# Altium PCB Temp_PowerBoard.PcbDoc (part 2 of 3)
Units mm, origin at the board's own origin, x right, y up, seen from the top; angles counter-clockwise.
Board outline 222.5 x 110 mm, 4 copper layers (Top Layer, Internal Plane 2, Internal Plane 1, Bottom Layer); 278 components, 231 nets, 981 pads, 487 vias.
Unrouted connection lines stored in the file: 81.
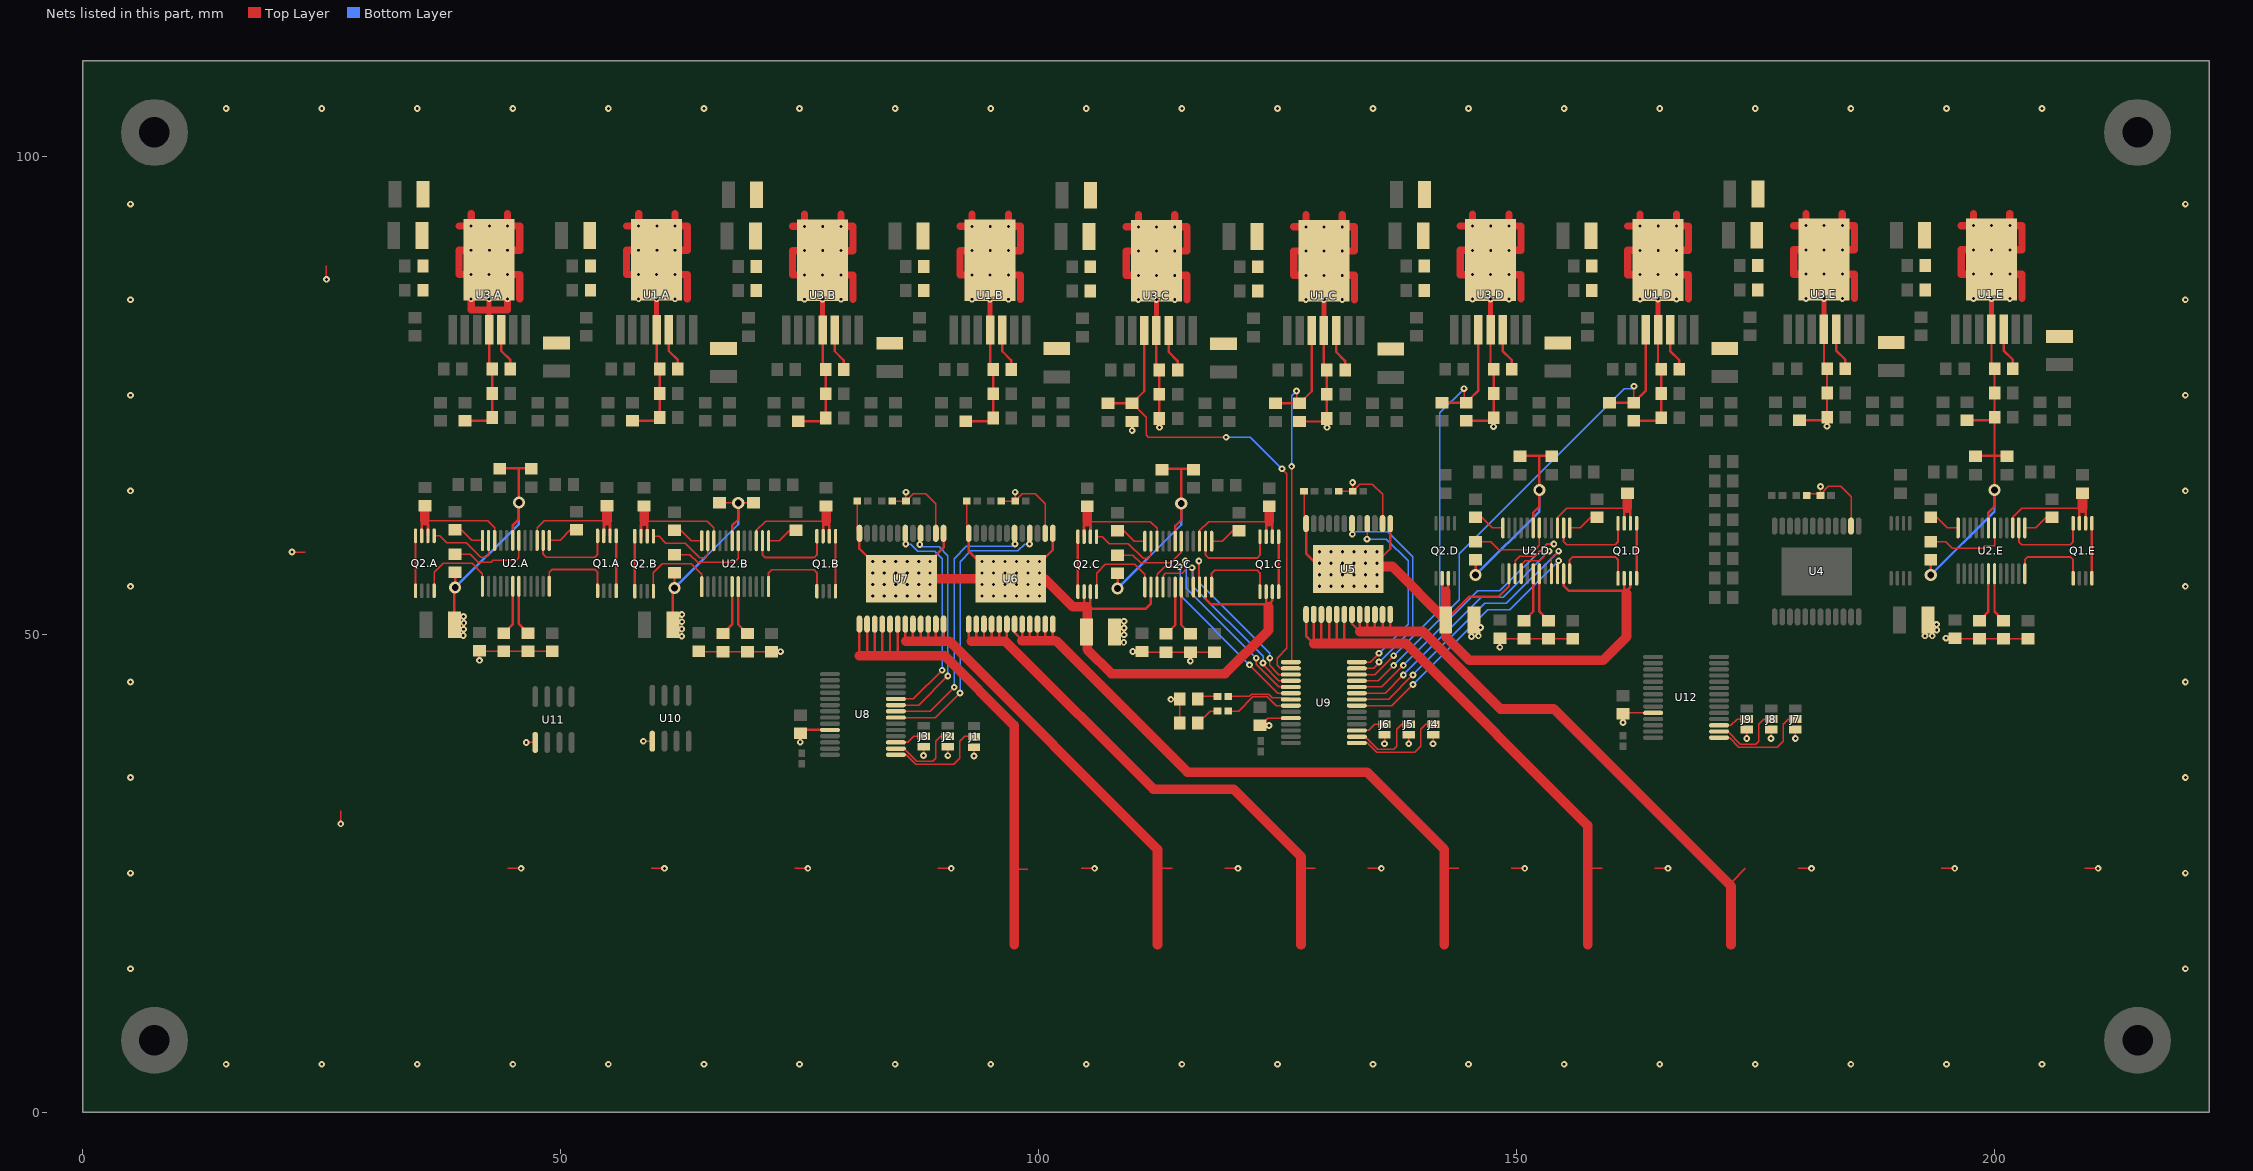
[diagram p4: the nets of this part, all layers, seen from the top]

## Via types
v1: diameter 0.7, hole 0.3, Top Layer to Bottom Layer, tented both sides, 231 vias
v2: diameter 0.7, hole 0.3, Top Layer to Bottom Layer, tented bottom, 120 vias
v3: diameter 0.66, hole 0.33, Top Layer to Bottom Layer, tented both sides, 96 vias
v4: diameter 1.27, hole 0.711, Top Layer to Bottom Layer, tented both sides, 40 vias

## Nets (pads, with @x,y where several pads share a name; then routed paths per layer and width w, separated by ;. In a path a pad name is that pad's centre, name@x,y a point inside that pad or via, vN(x,y) a via of type N, cw(c..) or ccw(c..) an arc to the next point about the centre after c; other vN are vias at no path point) (continued)
9V1: C1.C.2 Q1.C.S2 Q2.C.S1 R25.1 R26.1 U2.C.14 U2.C.23 U6.VCC U7.VCC | length 103.7
  Top Layer w0.152: R26.1@81.052,63.932 81.052,60.768 U7.VCC@81.266,60.554 ; R25.1@92.482,63.932 92.482,60.768 U6.VCC@92.696,60.554
  Top Layer w0.254: U7.VCC@81.266,60.554 81.266,58.942 84.404,55.804 U7.VCC@85.666,55.804 86.792,55.804 90.066,59.078 U7.VCC@90.066,60.554 ; U6.VCC@92.696,60.554 92.696,58.688 95.58,55.804 U6.VCC@97.096,55.804 98.476,55.804 101.496,58.824 U6.VCC@101.496,60.554 ; 104.774,53.208 Q2.C.S1@104.774,54.453 ; 105.099,52.678 111.244,52.678 111.767,53.201 U2.C.14@111.767,54.928 ; 105.424,53.208 Q2.C.S1@105.424,54.453 ; U2.C.23@117.482,54.928 117.482,53.709 118.053,53.137 123.895,53.137 ; Q1.C.S2@123.824,54.453 123.824,53.208 123.895,53.137 ; Q1.C.S2@124.474,54.453 124.474,53.542 124.069,53.137 123.895,53.137
  Top Layer w1.016: U7.VCC@86.792,55.804 U6.VCC@95.58,55.804 ; U6.VCC@98.476,55.804 100.652,55.804 103.599,52.857 105.099,52.857 105.099,52.678 105.099,48.412 107.639,45.872 119.532,45.872 124.069,50.409 124.069,52.857
  other v3: 82.666,54.004 83.866,54.004 85.066,54.004 86.266,54.004 87.466,54.004 88.666,54.004 94.096,54.004 95.296,54.004 96.496,54.004 97.696,54.004 98.896,54.004 100.096,54.004 82.666,55.204 83.866,55.204 85.066,55.204 86.266,55.204 87.466,55.204 88.666,55.204 94.096,55.204 95.296,55.204 96.496,55.204 97.696,55.204 98.896,55.204 100.096,55.204 82.666,56.404 83.866,56.404 85.066,56.404 86.266,56.404 87.466,56.404 88.666,56.404 94.096,56.404 95.296,56.404 96.496,56.404 97.696,56.404 98.896,56.404 100.096,56.404 82.666,57.604 83.866,57.604 85.066,57.604 86.266,57.604 87.466,57.604 88.666,57.604 94.096,57.604 95.296,57.604 96.496,57.604 97.696,57.604 98.896,57.604 100.096,57.604
9V1_EN1: R6.C.2 R9.C.1 U1.C.3 U9.1 | length 40.7
  Top Layer w0.152: U9.1@126.406,47.075 126.492,47.161 v1(126.492,67.564) ; v1(127,75.438) 127,74.477 R9.C.1@127.324,74.153
  Top Layer w0.254: R6.C.2@124.784,74.153 R9.C.1@127.324,74.153 128.594,75.423 U1.C.3@128.594,81.773
  Bottom Layer w0.152: v1(126.492,67.564) 126.492,74.93 v1(127,75.438)
9V1_EN2: R15.C.2 R18.C.1 U3.C.3 U9.2 | length 53
  Top Layer w0.152: R18.C.1@109.798,74.153 111.252,72.699 111.252,70.866 111.506,70.612 v1(119.634,70.612) ; v1(125.476,67.31) 125.984,66.802 125.984,48.514 124.968,47.498 124.968,46.736 125.279,46.425 U9.2@126.406,46.425
  Top Layer w0.254: R15.C.2@107.258,74.153 R18.C.1@109.798,74.153 110.116,74.47 111.068,75.423 U3.C.3@111.068,81.773
  Bottom Layer w0.152: v1(119.634,70.612) 122.174,70.612 v1(125.476,67.31)
9V1_FAULT1: U2.C.21 U9.4 | length 18.9
  Top Layer w0.152: v1(116.067,56.947) 116.212,56.803 U2.C.21@116.212,54.928 ; v1@123.495,46.787 125.158,45.125 U9.4@126.406,45.125
  Bottom Layer w0.152: v1@116.108,56.907 116.108,55.088 123.495,47.701 v1@123.495,46.787
  other v1: 123.495,46.99
9V1_FAULT2: U2.C.16 U9.5 | length 23.2
  Top Layer w0.152: U2.C.16@113.037,54.928 113.037,56.141 113.284,56.388 115.062,56.388 115.357,56.683 v1(115.357,57.658) ; v1(122.785,47.498) 122.785,46.856 125.166,44.475 U9.5@126.406,44.475
  Bottom Layer w0.152: v1(115.357,57.658) 115.458,57.557 115.458,54.825 v1(122.785,47.498)
9V1_PWRGD1: U2.C.22 U9.3 | length 19.4
  Top Layer w0.152: v1(116.778,57.658) 116.778,54.997 U2.C.22@116.847,54.928 ; v1(124.206,47.498) 124.206,46.735 125.166,45.775 U9.3@126.406,45.775
  Bottom Layer w0.152: v1(116.778,57.658) 116.778,55.434 124.206,48.006 v1(124.206,47.498)
9V1_PWRGD2: U2.C.15 U9.6 | length 23
  Top Layer w0.152: U2.C.15@112.402,54.928 112.402,56.268 113.189,57.055 v1(114.754,57.055) ; v1(122.074,46.787) 125.037,43.825 U9.6@126.406,43.825
  Bottom Layer w0.152: v1(114.754,57.055) v1@114.808,57.109 ; v1@114.808,57.15 v1@114.808,57.109 ; v1(122.074,46.787) 114.808,54.054 v1@114.808,57.109
9V1_RX1: U7.OUT1 | length 62.6
  Top Layer w0.152: 97.46,25.4 98.874,25.4
  Top Layer w0.254: 81.266,47.766 U7.OUT1@81.266,51.054 ; 82.066,47.982 U7.OUT1@82.066,51.054 ; 82.866,47.944 U7.OUT1@82.866,51.054 ; 83.666,47.906 U7.OUT1@83.666,51.054 ; 84.466,47.89 U7.OUT1@84.466,51.054 ; 85.266,47.83 U7.OUT1@85.266,51.054
  Top Layer w1.016: 81.28,47.752 90.17,47.752 97.46,40.462 97.46,25.4 97.46,17.5
9V1_RX1_EN: U7.IN1 U8.24 | length 22.2
  Top Layer w0.152: U8.24@85.076,43.229 86.917,43.229 v1(89.916,46.228)
  Bottom Layer w0.152: v1(86.106,59.436) 86.614,59.436 87.376,58.674 89.154,58.674 89.916,57.912 v1(89.916,46.228)
9V1_RX2: U7.OUT2 | length 57.2
  Top Layer w0.152: 112.46,25.662 112.622,25.5 113.974,25.5
  Top Layer w0.254: 86.066,49.316 U7.OUT2@86.066,51.054 ; 86.866,49.278 U7.OUT2@86.866,51.054 ; 87.666,49.312 U7.OUT2@87.666,51.054 ; 88.466,49.35 U7.OUT2@88.466,51.054 ; 89.266,49.388 U7.OUT2@89.266,51.054 ; 90.066,49.426 U7.OUT2@90.066,51.054
  Top Layer w1.016: 86.106,49.276 90.678,49.276 112.46,27.494 112.46,25.662 112.46,17.5
9V1_RX2_EN: U7.IN2 U8.23 | length 22.7
  Top Layer w0.152: U8.23@85.076,42.579 87.472,42.579 v1(90.519,45.625)
  Bottom Layer w0.152: v1(87.582,59.388) 87.836,59.134 89.614,59.134 90.519,58.229 v1(90.519,45.625)
9V1_TX1: U6.OUT1 | length 64.3
  Top Layer w0.152: 127.46,25.6 127.56,25.5 128.974,25.5
  Top Layer w0.254: 92.696,49.544 U6.OUT1@92.696,51.054 ; 93.496,49.506 U6.OUT1@93.496,51.054 ; 94.296,49.338 U6.OUT1@94.296,51.054 ; 95.096,49.43 U6.OUT1@95.096,51.054 ; 95.896,49.392 U6.OUT1@95.896,51.054 ; 96.696,49.452 U6.OUT1@96.696,51.054
  Top Layer w1.016: 92.964,49.276 96.52,49.276 112.014,33.782 120.396,33.782 127.46,26.718 127.46,25.6 127.46,17.5
9V1_TX1_EN: U6.IN1 U8.22 | length 27.6
  Top Layer w0.152: U8.22@85.076,41.929 88.665,41.929 v1(91.186,44.45)
  Bottom Layer w0.152: v1(91.186,44.45) 91.186,57.912 92.456,59.182 97.379,59.182 v1@97.584,59.388
  other v1: 97.536,59.436
9V1_TX2: U6.OUT2 | length 74.9
  Top Layer w0.152: 142.46,25.688 142.648,25.5 143.974,25.5
  Top Layer w0.254: U6.OUT2@97.496,51.054 97.496,50.17 98.296,49.37 U6.OUT2@98.296,51.054 ; 99.096,49.352 U6.OUT2@99.096,51.054 ; 99.896,49.39 U6.OUT2@99.896,51.054 ; 100.696,49.428 U6.OUT2@100.696,51.054 ; 101.496,49.634 U6.OUT2@101.496,51.054
  Top Layer w1.016: 98.242,49.316 101.814,49.316 115.57,35.56 134.366,35.56 142.46,27.466 142.46,25.688 142.46,17.5
9V1_TX2_EN: U6.IN2 U8.21 | length 29.6
  Top Layer w0.152: U8.21@85.076,41.279 89.22,41.279 v1(91.789,43.847)
  Bottom Layer w0.152: v1(91.789,43.847) 91.789,57.596 92.916,58.722 97.838,58.722 98.552,59.436 v1(99.06,59.436)
13V6: C1.D.2 Q1.D.S2 Q2.D.S1 R20.1 U2.D.14 U2.D.23 U5.VCC | length 82.5
  Top Layer w0.152: R20.1@127.788,64.948 127.788,61.784 U5.VCC@128.002,61.57
  Top Layer w0.254: U5.VCC@128.002,61.57 128.002,58.426 129.608,56.82 U5.VCC@132.402,56.82 134.688,56.82 134.942,57.074 136.802,58.934 U5.VCC@136.802,61.57 ; 142.237,54.605 Q2.D.S1@142.237,55.85 ; C1.D.2@142.611,51.486 145.049,53.924 148.133,53.924 149.229,55.021 U2.D.14@149.229,56.325 ; 142.887,54.605 Q2.D.S1@142.887,55.85 ; U2.D.23@154.944,56.325 154.945,55.106 155.516,54.534 161.358,54.534 ; Q1.D.S2@161.287,55.85 161.287,54.605 161.358,54.534 ; Q1.D.S2@161.937,55.85 161.937,54.939 161.532,54.534 161.358,54.534
  Top Layer w1.016: U5.VCC@134.942,57.074 137.023,57.074 C1.D.2@142.611,51.486 ; 142.611,54.485 C1.D.2@142.611,51.486 ; 161.532,54.254 161.532,49.729 159.072,47.269 145.102,47.269 142.613,49.759 142.613,51.484 C1.D.2@142.611,51.486
  other v3: 129.402,55.02 130.602,55.02 131.802,55.02 133.002,55.02 134.202,55.02 135.402,55.02 129.402,56.22 130.602,56.22 131.802,56.22 133.002,56.22 134.202,56.22 135.402,56.22 129.402,57.42 130.602,57.42 131.802,57.42 133.002,57.42 134.202,57.42 135.402,57.42 129.402,58.62 130.602,58.62 131.802,58.62 133.002,58.62 134.202,58.62 135.402,58.62
13V6_EN1: R6.D.2 R9.D.1 U1.D.3 U9.25 | length 57.2
  Top Layer w0.152: U9.25@133.306,45.125 135.549,45.125 v1(137.16,46.736) ; R9.D.1@162.284,74.231 162.306,74.253 v1(162.306,75.946)
  Top Layer w0.254: R6.D.2@159.744,74.231 R9.D.1@162.284,74.231 163.554,75.501 U1.D.3@163.554,81.851
  Bottom Layer w0.152: v1(137.16,46.736) 144.018,53.594 144.018,58.42 161.29,75.692 162.306,75.692 v1(162.306,75.946)
13V6_EN2: R15.D.2 R18.D.1 U3.D.3 U9.26 | length 47.9
  Top Layer w0.152: U9.26@133.306,45.775 135.183,45.775 v1(137.16,47.752) ; v1(144.526,75.692) 144.526,74.463 R18.D.1@144.758,74.231
  Top Layer w0.254: R15.D.2@142.218,74.231 R18.D.1@144.758,74.231 145.075,74.548 146.028,75.501 U3.D.3@146.028,81.851
  Bottom Layer w0.152: v1(137.16,47.752) 141.986,52.578 141.986,73.152 v1(144.526,75.692)
13V6_FAULT1: U2.D.21 U9.22 | length 30.2
  Top Layer w0.152: U9.22@133.306,43.175 136.625,43.175 v1(139.181,45.731) ; U2.D.21@153.674,56.325 153.674,57.939 v1(154.421,58.685)
  Bottom Layer w0.152: v1(139.181,45.731) 146.678,53.228 148.964,53.228 v1(154.421,58.685)
13V6_FAULT2: U2.D.16 U9.23 | length 30.7
  Top Layer w0.152: U9.23@133.306,43.825 136.27,43.825 v1(138.176,45.731) ; U2.D.16@150.499,56.325 150.499,57.281 150.916,57.698 152.429,57.698 v1(153.416,58.685)
  Bottom Layer w0.152: v1(138.176,45.731) 146.323,53.878 148.609,53.878 v1(153.416,58.685)
13V6_PWRGD1: U2.D.22 U9.21 | length 28.9
  Top Layer w0.152: U9.21@133.306,42.525 136.979,42.525 v1(139.181,44.726) ; U2.D.22@154.309,56.325 154.309,57.698 154.403,57.698 v1(154.421,57.68)
  Bottom Layer w0.152: v1(139.181,44.726) 147.032,52.578 149.318,52.578 v1(154.421,57.68)
13V6_PWRGD2: U2.D.15 U9.24 | length 32.9
  Top Layer w0.152: U9.24@133.306,44.475 135.915,44.475 v1(138.176,46.736) ; U2.D.15@149.864,56.325 149.864,57.662 150.368,58.166 151.892,58.166 153.162,59.436 v1(153.924,59.436)
  Bottom Layer w0.152: v1(138.176,46.736) 145.968,54.528 148.254,54.528 153.162,59.436 v1(153.924,59.436)
13V6_TX1: U5.OUT1 | length 69.1
  Top Layer w0.152: 157.56,25.5 158.974,25.5
  Top Layer w0.254: U5.OUT1@128.002,52.07 128.002,49.822 128.802,49.022 U5.OUT1@128.802,52.07 ; 129.602,49.022 U5.OUT1@129.602,52.07 ; 130.402,49.022 U5.OUT1@130.402,52.07 ; 131.202,49.022 U5.OUT1@131.202,52.07 ; 132.002,49.022 U5.OUT1@132.002,52.07
  Top Layer w1.016: 128.802,49.022 129.602,49.022 130.402,49.022 131.202,49.022 132.002,49.022 138.43,49.022 157.46,29.992 157.46,17.5
13V6_TX1_EN: U5.IN1 U9.27 | length 22.7
  Top Layer w0.152: U9.27@133.306,46.425 135.06,46.425 v1@135.636,47.001
  Bottom Layer w0.152: v1(132.842,60.452) 132.842,60.695 136.566,60.695 139.144,58.118 139.144,50.594 v1(135.636,47.087) v1@135.636,47.001
13V6_TX2: U5.OUT2 | length 69.5
  Top Layer w0.152: 172.46,23.628 172.46,23.986 173.974,25.5
  Top Layer w0.254: U5.OUT2@132.802,52.07 132.802,51.092 133.602,50.292 U5.OUT2@133.602,52.07 ; 134.402,50.292 U5.OUT2@134.402,52.07 ; 135.202,50.292 U5.OUT2@135.202,52.07 ; 136.002,50.292 U5.OUT2@136.002,52.07 ; 136.802,50.292 U5.OUT2@136.802,52.07
  Top Layer w1.016: 133.602,50.292 134.402,50.292 135.202,50.292 136.002,50.292 136.802,50.292 140.208,50.292 148.336,42.164 153.924,42.164 172.46,23.628 172.46,17.5
13V6_TX2_EN: U5.IN2 U9.28 | length 20.5
  Top Layer w0.152: U9.28@133.306,47.075 134.705,47.075 v1(135.636,48.006) ; v1@134.402,59.98 U5.IN2@134.402,61.57
  Bottom Layer w0.152: v1(134.366,59.944) 136.398,59.944 138.684,57.658 138.684,51.054 v1(135.636,48.006)
DEBUG1: R33.1 U9.8 | length 7.6
  Top Layer w0.152: R33.1@119.838,41.962 120.956,41.962 122.428,43.434 123.952,43.434 124.861,42.525 U9.8@126.406,42.525
DEBUG2: R34.1 U9.7 | length 6.9
  Top Layer w0.152: R34.1@119.838,43.486 122.049,43.486 122.302,43.739 124.078,43.739 124.446,43.371 126.21,43.371 U9.7@126.406,43.175
GND: C1.A.1 C1.B.1 C1.C.1 C1.D.1 C1.E.1 C3.A.2 C3.B.2 C3.C.2 C3.D.2 C3.E.2 C4.A.1 C4.B.1 C4.C.1 C4.D.1 C4.E.1 C6.A.1 C6.B.1 C6.C.1 C6.D.1 C6.E.1 C7.A.1 C7.B.1 C7.C.1 C7.D.1 C7.E.1 C8.A.1 C8.B.1 C8.C.1 C8.D.1 C8.E.1 C9.A.2 C9.B.2 C9.C.2 C9.D.2 C9.E.2 C10.A.2 C10.B.2 C10.C.2 C10.D.2 C10.E.2 C11.A.1 C11.B.1 C11.C.1 C11.D.1 C11.E.1 C13.A.2 C13.B.2 C13.C.2 C13.D.2 C13.E.2 C15.A.1 C15.B.1 C15.C.1 C15.D.1 C15.E.1 C16.A.1 C16.B.1 C16.C.1 C16.D.1 C16.E.1 C17.A.2 C17.B.2 C17.C.2 C17.D.2 C17.E.2 C18.A.2 C18.B.2 C18.C.2 C18.D.2 C18.E.2 C19.A.1 C19.B.1 C19.C.1 C19.D.1 C19.E.1 C20.2 C21.2 C22.2 D1.2 D2.2 J1.3 J2.3 J3.3 J4.3 J5.3 J6.3 J7.3 J8.3 J9.3 R3.A.1 R3.B.1 R3.C.1 R3.D.1 R3.E.1 R7.A.1 R7.B.1 R7.C.1 R7.D.1 R7.E.1 R8.A.1 R8.B.1 R8.C.1 R8.D.1 R8.E.1 R9.A.2 R9.B.2 R9.C.2 R9.D.2 R9.E.2 R10.A.1 R10.B.1 R10.C.1 R10.D.1 R10.E.1 R16.A.1 R16.B.1 R16.C.1 R16.D.1 R16.E.1 R17.A.1 R17.B.1 R17.C.1 R17.D.1 R17.E.1 R18.A.2 R18.B.2 R18.C.2 R18.D.2 R18.E.2 R21.2 R22.2 R23.2 R24.2 R27.2 R28.2 R29.2 R30.2 R44.A.2 R44.B.2 R44.C.2 R44.D.2 R44.E.2 R45.A.2 R45.B.2 R45.C.2 R45.D.2 R45.E.2 U1.A.4 U1.B.4 U1.C.4 U1.D.4 U1.E.4 U2.A.7 U2.B.7 U2.C.7 U2.D.7 U2.E.7 U3.A.4 U3.B.4 U3.C.4 U3.D.4 U3.E.4 U4.GND U5.GND U6.GND U7.GND U8.10 U9.10 U10.5 U11.5 U12.10 | length 891.1
  Top Layer w0.152: v1(21.9,58.59) 23.3,58.59 ; v1(25.5,87.126) 25.5,88.526 ; v1(27,30.15) 27,31.55 ; C1.A.1@38.862,49.86 v1(39.812,49.86) ; C1.A.1@38.887,50.521 v1(39.837,50.521) ; C1.A.1@38.887,51.841 v1(39.837,51.841) ; C1.A.1@38.913,51.181 v1(39.862,51.181) ; v1(41.508,47.26) 41.508,48.21 R44.A.2@49.128,48.21 ; 44.474,25.5 v1(45.874,25.5) ; v1(46.407,38.672) U11.5@47.338,38.672 ; v1(58.662,38.803) U10.5@59.593,38.803 ; 59.474,25.5 v1(60.874,25.5) ; C1.B.1@61.722,49.784 v1(62.672,49.784) ; C1.B.1@61.722,50.546 v1(62.672,50.546) ; C1.B.1@61.741,51.308 v1(62.691,51.308) ; C1.B.1@61.741,52.07 v1(62.691,52.07) ; R45.B.2@64.453,48.172 R44.B.2@72.073,48.172 v1(73.004,48.172) ; R10.B.1@66.612,63.744 R3.B.1@70.172,63.744 ; 74.474,25.5 v1(75.874,25.5) ; v1(75.08,38.707) C20.2@75.08,39.638 ; R29.2@84.692,63.932 R30.2@86.132,63.932 ; v1(86.132,64.863) R30.2@86.132,63.932 ; v1@87.976,37.092 J3.3@87.976,38.236 ; U7.GND@89.266,60.554 89.266,63.634 88.206,64.694 86.894,64.694 R30.2@86.132,63.932 ; 89.474,25.5 v1(90.874,25.5) ; v1@90.516,37.083 J2.3@90.516,38.227 ; v1@93.256,37.043 J1.3@93.256,38.187 ; R27.2@96.122,63.932 R28.2@97.562,63.932 ; v1(97.562,64.863) R28.2@97.562,63.932 ; U6.GND@100.696,60.554 100.696,63.634 99.636,64.694 98.324,64.694 R28.2@97.562,63.932 ; 104.474,25.5 v1(105.874,25.5) ; C1.C.1@107.975,49.149 v1(108.925,49.149) ; C1.C.1@108.001,49.936 v1(108.95,49.936) ; C1.C.1@108.001,50.648 v1(108.95,50.648) ; C1.C.1@108.001,51.359 v1(108.95,51.359) ; v1(109.798,71.322) R18.C.2@109.798,72.253 ; v1(109.864,48.189) R45.C.2@110.814,48.189 ; R45.C.2@110.814,48.123 R44.C.2@118.434,48.123 ; v1(112.658,71.637) R16.C.1@112.658,72.568 ; v1(113.851,43.18) D2.2@114.782,43.18 ; D1.2@114.782,40.692 D2.2@114.782,43.232 ; v1(115.894,47.192) C4.C.1@115.894,48.123 ; 119.474,25.5 v1(120.874,25.5) ; v1(124.121,40.452) C21.2@123.19,40.452 123.963,41.225 U9.10@126.406,41.225 ; v1(130.184,71.637) R8.C.1@130.184,72.568 ; R23.2@131.428,64.948 R24.2@132.868,64.948 ; v1(132.868,65.879) R24.2@132.868,64.948 ; 134.474,25.5 v1(135.874,25.5) ; U5.GND@136.002,61.57 136.002,64.65 134.942,65.71 133.63,65.71 R24.2@132.868,64.948 ; v1@136.206,38.329 v1(136.206,38.532) J6.3@136.206,39.473 ; v1@138.746,38.329 v1(138.746,38.532) J5.3@138.746,39.473 ; v1@141.286,38.329 v1(141.286,38.532) J4.3@141.286,39.473 ; v1(145.313,49.749) 145.313,50.698 v1(146.263,50.698) ; v1(146.025,49.825) C1.D.1@146.025,50.775 ; v1(147.618,71.715) R16.D.1@147.618,72.646 ; v1(148.277,48.636) R45.D.2@148.277,49.586 ; R45.D.2@148.277,49.52 R44.D.2@155.897,49.52 ; 149.474,25.5 v1(150.874,25.5) ; v1(161.158,40.751) C22.2@161.158,41.682 161.245,41.769 U12.10@164.312,41.769 ; 164.474,25.5 v1(165.874,25.5) ; v1(174.112,39.076) J9.3@174.112,40.026 ; v1(176.652,39.076) J8.3@176.652,40.026 ; v1(179.192,39.076) J7.3@179.192,40.026 ; 179.474,25.5 v1(180.874,25.5) ; R21.2@180.45,64.694 181.89,64.694 182.652,65.456 183.964,65.456 185.024,64.396 U4.GND@185.024,61.316 ; R22.2@181.822,64.516 v1(181.822,65.447) ; v1(182.508,71.764) R16.E.1@182.508,72.695 ; v1(192.761,49.825) C1.E.1@192.761,50.775 ; C1.E.1@193.015,51.029 v1(193.964,51.029) ; C1.E.1@193.04,50.444 v1(193.99,50.444) ; v1(193.523,49.825) C1.E.1@193.523,50.775 ; 194.474,25.5 v1(195.874,25.5) ; v1(194.954,49.586) R45.E.2@195.904,49.586 ; R45.E.2@195.904,49.52 R44.E.2@203.524,49.52 ; 209.474,25.5 v1(210.874,25.5)
  Top Layer w0.254: C1.A.1@38.881,50.978 38.881,54.788 v4(38.968,54.875) C3.A.2@38.968,56.465 ; R18.A.2@39.984,72.34 R16.A.1@42.529,72.34 ; U3.A.4@42.524,81.86 42.524,78.055 C18.A.2@42.844,77.735 R17.A.1@42.844,75.195 R16.A.1@42.844,72.655 ; R10.A.1@43.667,67.382 45.638,67.382 ; U2.A.7@45.003,59.817 U2.A.7@45.001,59.815 45.001,61.415 45.638,62.053 v4(45.638,63.765) 45.638,67.382 ; R3.A.1@46.969,67.382 45.638,67.382 ; R9.A.2@57.51,72.34 R8.A.1@60.055,72.34 ; U1.A.4@60.05,81.86 60.05,78.055 C10.A.2@60.37,77.735 R8.A.1@60.37,72.655 ; C1.B.1@61.741,50.978 61.741,54.665 v4(61.913,54.837) C3.B.2@61.913,56.427 ; U2.B.7@67.948,59.779 U2.B.7@67.946,59.777 67.946,61.378 68.583,62.015 v4(68.583,63.727) ; R18.B.2@74.867,72.302 R16.B.1@77.412,72.302 ; C20.2@75.08,39.638 75.421,39.979 U8.10@78.176,39.979 ; U3.B.4@77.407,81.822 77.407,78.017 C18.B.2@77.727,77.697 R16.B.1@77.727,72.617 ; R9.B.2@92.393,72.302 R8.B.1@94.938,72.302 ; U1.B.4@94.933,81.822 94.933,78.017 C10.B.2@95.253,77.697 R8.B.1@95.253,72.617 ; v4(108.274,54.788) C3.C.2@108.274,56.378 ; U3.C.4@112.338,81.773 112.338,77.968 C18.C.2@112.658,77.648 R16.C.1@112.658,72.568 ; R10.C.1@112.973,67.295 114.944,67.295 ; U2.C.7@114.309,59.731 U2.C.7@114.307,59.728 114.307,61.329 114.944,61.966 v4(114.944,63.678) 114.944,67.295 ; R3.C.1@116.275,67.295 114.944,67.295 ; R9.C.2@127.324,72.253 R8.C.1@129.869,72.253 ; U1.C.4@129.864,81.773 129.864,77.968 C10.C.2@130.184,77.648 R8.C.1@130.184,72.568 ; R18.D.2@144.758,72.331 R16.D.1@147.303,72.331 ; v4(145.737,56.185) C3.D.2@145.737,57.775 ; U3.D.4@147.298,81.851 147.298,78.046 C18.D.2@147.618,77.726 R16.D.1@147.618,72.646 ; R10.D.1@150.436,68.692 152.407,68.692 ; U2.D.7@151.772,61.127 U2.D.7@151.769,61.125 151.769,62.725 152.407,63.363 v4(152.407,65.075) 152.407,68.692 ; R3.D.1@153.738,68.692 152.407,68.692 ; R9.D.2@162.284,72.331 R8.D.1@164.829,72.331 ; U1.D.4@164.824,81.851 164.824,78.046 C10.D.2@165.144,77.726 R8.D.1@165.144,72.646 ; R18.E.2@179.648,72.38 R16.E.1@182.193,72.38 ; U3.E.4@182.188,81.9 182.188,78.095 C18.E.2@182.508,77.775 R16.E.1@182.508,72.695 ; v4(193.364,56.185) C3.E.2@193.364,57.775 ; R9.E.2@197.174,72.38 R8.E.1@199.719,72.38 ; R10.E.1@198.063,68.692 200.034,68.692 ; U2.E.7@199.399,61.128 U2.E.7@199.397,61.125 199.397,62.726 200.034,63.363 v4(200.034,65.075) 200.034,68.692 ; U1.E.4@199.714,81.9 199.714,78.095 C10.E.2@200.034,77.775 R8.E.1@200.034,72.695 200.034,68.692 ; R3.E.1@201.365,68.692 200.034,68.692
  Top Layer w0.508: U3.A.4@42.524,81.86 42.524,83.923 v2(42.524,87.63) U3.A.4@42.524,89.165 ; U1.A.4@60.05,81.86 U1.A.4@60.05,89.165 v2(60.05,87.63) ; U3.B.4@77.407,81.822 U3.B.4@77.407,89.127 v2(77.407,87.592) ; U1.B.4@94.933,81.822 U1.B.4@94.933,89.127 v2(94.933,87.592) ; U3.C.4@112.338,81.773 U3.C.4@112.338,89.078 v2(112.338,87.543) ; U1.C.4@129.864,81.773 U1.C.4@129.864,89.078 v2(129.864,87.543) ; U3.D.4@147.298,81.851 U3.D.4@147.298,89.156 v2(147.298,87.621) ; U1.D.4@164.824,81.851 U1.D.4@164.824,89.156 v2(164.824,87.621) ; U3.E.4@182.188,81.9 U3.E.4@182.188,89.205 v2(182.188,87.67) ; U1.E.4@199.714,81.9 U1.E.4@199.714,89.205 v2(199.714,87.67)
  Top Layer w0.762: 39.37,92.71 v2(40.64,92.71) ; 40.64,93.98 v2(40.64,92.71) ; 44.45,93.98 v2(44.45,92.71) ; 45.72,85.09 45.72,87.63 v2(44.45,87.63) ; 56.896,92.71 v2(58.166,92.71) ; 58.166,93.98 v2(58.166,92.71) ; 61.976,93.98 v2(61.976,92.71) ; 63.246,85.09 63.246,87.63 v2(61.976,87.63) ; 74.253,92.672 v2(75.523,92.672) ; 75.523,93.942 v2(75.523,92.672) ; 79.333,93.942 v2(79.333,92.672) ; 80.603,85.052 80.603,87.592 v2(79.333,87.592) ; 91.779,92.672 v2(93.049,92.672) ; 93.049,93.942 v2(93.049,92.672) ; 96.859,93.942 v2(96.859,92.672) ; 98.129,85.052 98.129,87.592 v2(96.859,87.592) ; 109.184,92.623 v2(110.454,92.623) ; 110.454,93.893 v2(110.454,92.623) ; 114.264,93.893 v2(114.264,92.623) ; 115.534,85.003 115.534,87.543 v2(114.264,87.543) ; 126.71,92.623 v2(127.98,92.623) ; 127.98,93.893 v2(127.98,92.623) ; 131.79,93.893 v2(131.79,92.623) ; 133.06,85.003 133.06,87.543 v2(131.79,87.543) ; 144.144,92.701 v2(145.414,92.701) ; 145.414,93.971 v2(145.414,92.701) ; 149.224,93.971 v2(149.224,92.701) ; 150.494,85.081 150.494,87.621 v2(149.224,87.621) ; 161.67,92.701 v2(162.94,92.701) ; 162.94,93.971 v2(162.94,92.701) ; 166.75,93.971 v2(166.75,92.701) ; 168.02,85.081 168.02,87.621 v2(166.75,87.621) ; 179.034,92.75 v2(180.304,92.75) ; 180.304,94.02 v2(180.304,92.75) ; 184.114,94.02 v2(184.114,92.75) ; 185.384,85.13 185.384,87.67 v2(184.114,87.67) ; 196.56,92.75 v2(197.83,92.75) ; 197.83,94.02 v2(197.83,92.75) ; 201.64,94.02 v2(201.64,92.75) ; 202.91,85.13 202.91,87.67 v2(201.64,87.67) ; v2(40.64,87.63) v2(42.524,87.63) v2(44.45,87.63) ; v2(40.64,87.63) 39.37,87.63 39.37,90.17 v2(40.64,90.17) ; v2(40.64,87.63) v2(40.64,90.17) ; v2(40.64,87.63) 40.64,83.923 42.524,83.923 44.45,83.923 v2(44.45,87.63) ; v2(40.64,90.17) v2(44.45,90.17) ; v2(40.64,90.17) v2(40.64,92.71) ; v2(40.64,92.71) v2(44.45,92.71) ; v2(44.45,87.63) v2(44.45,90.17) ; v2(44.45,90.17) 45.72,90.17 45.72,92.71 v2(44.45,92.71) ; v2(44.45,90.17) v2(44.45,92.71) ; v2(58.166,87.63) v2(58.166,90.17) ; v2(58.166,87.63) 56.896,87.63 56.896,90.17 v2(58.166,90.17) ; v2(58.166,87.63) v2(60.05,87.63) v2(61.976,87.63) ; v2(58.166,90.17) v2(58.166,92.71) ; v2(58.166,90.17) v2(61.976,90.17) ; v2(58.166,92.71) v2(61.976,92.71) ; v2(61.976,87.63) v2(61.976,90.17) ; v2(61.976,90.17) v2(61.976,92.71) ; v2(61.976,90.17) 63.246,90.17 63.246,92.71 v2(61.976,92.71) ; v2(75.523,87.592) v2(75.523,90.132) ; v2(75.523,87.592) 74.253,87.592 74.253,90.132 v2(75.523,90.132) ; v2(75.523,87.592) v2(77.407,87.592) v2(79.333,87.592) ; v2(75.523,90.132) v2(75.523,92.672) ; v2(75.523,90.132) v2(79.333,90.132) ; v2(75.523,92.672) v2(79.333,92.672) ; v2(79.333,87.592) v2(79.333,90.132) ; v2(79.333,90.132) v2(79.333,92.672) ; v2(79.333,90.132) 80.603,90.132 80.603,92.672 v2(79.333,92.672) ; v2(93.049,87.592) v2(93.049,90.132) ; v2(93.049,87.592) 91.779,87.592 91.779,90.132 v2(93.049,90.132) ; v2(93.049,87.592) v2(94.933,87.592) v2(96.859,87.592) ; v2(93.049,90.132) v2(93.049,92.672) ; v2(93.049,90.132) v2(96.859,90.132) ; v2(93.049,92.672) v2(96.859,92.672) ; v2(96.859,87.592) v2(96.859,90.132) ; v2(96.859,90.132) v2(96.859,92.672) ; v2(96.859,90.132) 98.129,90.132 98.129,92.672 v2(96.859,92.672) ; v2(110.454,87.543) v2(110.454,90.083) ; v2(110.454,87.543) 109.184,87.543 109.184,90.083 v2(110.454,90.083) ; v2(110.454,87.543) v2(112.338,87.543) v2(114.264,87.543) ; v2(110.454,90.083) v2(110.454,92.623) ; v2(110.454,90.083) v2(114.264,90.083) ; v2(110.454,92.623) v2(114.264,92.623) ; v2(114.264,87.543) v2(114.264,90.083) ; v2(114.264,90.083) v2(114.264,92.623) ; v2(114.264,90.083) 115.534,90.083 115.534,92.623 v2(114.264,92.623) ; v2(127.98,87.543) v2(127.98,90.083) ; v2(127.98,87.543) 126.71,87.543 126.71,90.083 v2(127.98,90.083) ; v2(127.98,87.543) v2(129.864,87.543) v2(131.79,87.543) ; v2(127.98,90.083) v2(127.98,92.623) ; v2(127.98,90.083) v2(131.79,90.083) ; v2(127.98,92.623) v2(131.79,92.623) ; v2(131.79,87.543) v2(131.79,90.083) ; v2(131.79,90.083) v2(131.79,92.623) ; v2(131.79,90.083) 133.06,90.083 133.06,92.623 v2(131.79,92.623) ; v2(145.414,87.621) v2(145.414,90.161) ; v2(145.414,87.621) 144.144,87.621 144.144,90.161 v2(145.414,90.161) ; v2(145.414,87.621) v2(147.298,87.621) v2(149.224,87.621) ; v2(145.414,90.161) v2(145.414,92.701) ; v2(145.414,90.161) v2(149.224,90.161) ; v2(145.414,92.701) v2(149.224,92.701) ; v2(149.224,87.621) v2(149.224,90.161) ; v2(149.224,90.161) v2(149.224,92.701) ; v2(149.224,90.161) 150.494,90.161 150.494,92.701 v2(149.224,92.701) ; v2(162.94,87.621) v2(162.94,90.161) ; v2(162.94,87.621) 161.67,87.621 161.67,90.161 v2(162.94,90.161) ; v2(162.94,87.621) v2(164.824,87.621) v2(166.75,87.621) ; v2(162.94,90.161) v2(162.94,92.701) ; v2(162.94,90.161) v2(166.75,90.161) ; v2(162.94,92.701) v2(166.75,92.701) ; v2(166.75,87.621) v2(166.75,90.161) ; v2(166.75,90.161) v2(166.75,92.701) ; v2(166.75,90.161) 168.02,90.161 168.02,92.701 v2(166.75,92.701) ; v2(180.304,87.67) v2(180.304,90.21) ; v2(180.304,87.67) 179.034,87.67 179.034,90.21 v2(180.304,90.21) ; v2(180.304,87.67) v2(182.188,87.67) v2(184.114,87.67) ; v2(180.304,90.21) v2(180.304,92.75) ; v2(180.304,90.21) v2(184.114,90.21) ; v2(180.304,92.75) v2(184.114,92.75) ; v2(184.114,87.67) v2(184.114,90.21) ; v2(184.114,90.21) v2(184.114,92.75) ; v2(184.114,90.21) 185.384,90.21 185.384,92.75 v2(184.114,92.75) ; v2(197.83,87.67) v2(197.83,90.21) ; v2(197.83,87.67) 196.56,87.67 196.56,90.21 v2(197.83,90.21) ; v2(197.83,87.67) v2(199.714,87.67) v2(201.64,87.67) ; v2(197.83,90.21) v2(197.83,92.75) ; v2(197.83,90.21) v2(201.64,90.21) ; v2(197.83,92.75) v2(201.64,92.75) ; v2(201.64,87.67) v2(201.64,90.21) ; v2(201.64,90.21) v2(201.64,92.75) ; v2(201.64,90.21) 202.91,90.21 202.91,92.75 v2(201.64,92.75)
  Bottom Layer w0.254: v4(38.968,54.875) 45.638,61.545 v4(45.638,63.765) ; v4(61.913,54.837) 68.583,61.507 v4(68.583,63.727) ; v4(108.274,54.788) 114.944,61.458 v4(114.944,63.678) ; v4(145.737,56.185) 152.407,62.855 v4(152.407,65.075) ; v4(193.364,56.185) 200.034,62.855 v4(200.034,65.075)
  other v1: 15,5 25,5 35,5 45,5 55,5 65,5 75,5 85,5 95,5 105,5 115,5 125,5 135,5 145,5 155,5 165,5 175,5 185,5 195,5 205,5 5,15 220,15 5,25 220,25 5,35 220,35 93.256,37.255 87.976,37.304 90.516,37.295 5,45 220,45 5,55 220,55 5,65 220,65 5,75 220,75 5,85 220,85 5,95 220,95 15,105 25,105 35,105 45,105 55,105 65,105 75,105 85,105 95,105 105,105 115,105 125,105 135,105 145,105 155,105 165,105 175,105 185,105 195,105 205,105
  other v2: 110.454,85.003 112.338,85.003 114.264,85.003 127.98,85.003 129.864,85.003 131.79,85.003 75.523,85.052 77.407,85.052 79.333,85.052 93.049,85.052 94.933,85.052 96.859,85.052 40.64,85.09 42.524,85.09 44.45,85.09 58.166,85.09 60.05,85.09 61.976,85.09 145.414,85.081 147.298,85.081 149.224,85.081 162.94,85.081 164.824,85.081 166.75,85.081 180.304,85.13 182.188,85.13 184.114,85.13 197.83,85.13 199.714,85.13 201.64,85.13 112.359,90.083 129.885,90.083 77.428,90.132 94.954,90.132 42.545,90.17 60.071,90.17 147.319,90.161 164.845,90.161 182.209,90.21 199.735,90.21 112.359,92.623 129.885,92.623 77.428,92.672 94.954,92.672 42.545,92.71 60.071,92.71 147.319,92.701 164.845,92.701 182.209,92.75 199.735,92.75
NetC2.A_2: C2.A.2 U2.A.1 | length 2.7
  Top Layer w0.152: U2.A.1@48.811,59.815 49.938,59.815 C2.A.2@51.033,60.91
NetC2.B_2: C2.B.2 U2.B.1 | length 2.7
  Top Layer w0.152: U2.B.1@71.756,59.777 72.883,59.777 C2.B.2@73.978,60.872
NetC2.C_2: C2.C.2 U2.C.1 | length 2.7
  Top Layer w0.152: U2.C.1@118.117,59.728 119.244,59.728 C2.C.2@120.339,60.823
NetC2.D_2: C2.D.2 U2.D.1 | length 2.7
  Top Layer w0.152: U2.D.1@155.579,61.125 156.707,61.125 C2.D.2@157.802,62.22
NetC2.E_2: C2.E.2 U2.E.1 | length 2.7
  Top Layer w0.152: U2.E.1@203.207,61.125 204.334,61.125 C2.E.2@205.429,62.22
NetC3.A_1: C3.A.1 U2.A.6 | length 9
  Top Layer w0.152: C3.A.1@38.968,58.365 40.558,58.365 41.381,57.542 42.737,57.542 42.923,57.729 45.378,57.729 45.636,57.986 U2.A.6@45.636,59.815
NetC3.B_1: C3.B.1 U2.B.6 | length 9
  Top Layer w0.152: C3.B.1@61.913,58.327 63.503,58.327 64.326,57.504 68.136,57.504 68.581,57.949 U2.B.6@68.581,59.777
NetC3.C_1: C3.C.1 U2.C.6 | length 8.6
  Top Layer w0.152: C3.C.1@108.274,58.278 109.864,58.278 110.687,57.455 113.843,57.455 114.942,58.554 U2.C.6@114.942,59.728
NetC3.D_1: C3.D.1 U2.D.6 | length 9
  Top Layer w0.152: C3.D.1@145.737,59.675 147.327,59.675 148.15,58.852 151.96,58.852 152.405,59.297 U2.D.6@152.404,61.125
NetC3.E_1: C3.E.1 U2.E.6 | length 8.9
  Top Layer w0.152: C3.E.1@193.364,59.675 194.954,59.675 195.63,58.999 198.794,58.999 199.048,59.253 199.988,59.253 200.032,59.297 U2.E.6@200.032,61.125
NetC4.A_2: C4.A.2 U2.A.19 | length 5.3
  Top Layer w0.254: U2.A.19@45.636,55.015 45.636,51.062 C4.A.2@46.588,50.11
NetC4.B_2: C4.B.2 U2.B.19 | length 5.3
  Top Layer w0.254: U2.B.19@68.581,54.977 68.581,51.024 C4.B.2@69.533,50.072
NetC4.C_2: C4.C.2 U2.C.19 | length 5.3
  Top Layer w0.254: U2.C.19@114.942,54.928 114.942,50.976 C4.C.2@115.894,50.023
NetC4.D_2: C4.D.2 U2.D.19 | length 5.3
  Top Layer w0.254: U2.D.19@152.404,56.325 152.405,52.372 C4.D.2@153.357,51.42
NetC4.E_2: C4.E.2 U2.E.19 | length 5.3
  Top Layer w0.254: U2.E.19@200.032,56.325 200.032,52.373 C4.E.2@200.984,51.42
NetC6.A_2: C6.A.2 U2.A.18 | length 5.3
  Top Layer w0.254: C6.A.2@44.048,50.11 45.001,51.063 U2.A.18@45.001,55.015
NetC6.B_2: C6.B.2 U2.B.18 | length 5.3
  Top Layer w0.254: C6.B.2@66.993,50.072 67.946,51.024 U2.B.18@67.946,54.977
NetC6.C_2: C6.C.2 U2.C.18 | length 5.3
  Top Layer w0.254: C6.C.2@113.354,50.023 114.307,50.975 U2.C.18@114.307,54.928
NetC6.D_2: C6.D.2 U2.D.18 | length 5.3
  Top Layer w0.254: C6.D.2@150.817,51.42 151.769,52.372 U2.D.18@151.769,56.325
NetC6.E_2: C6.E.2 U2.E.18 | length 5.3
  Top Layer w0.254: C6.E.2@198.444,51.42 199.397,52.372 U2.E.18@199.397,56.325
NetC10.A_1: C10.A.1 U1.A.5 | length 4.5
  Top Layer w0.254: U1.A.5@61.32,81.86 61.32,79.64 62.27,78.69 C10.A.1@62.27,77.735
NetC10.B_1: C10.B.1 U1.B.5 | length 4.5
  Top Layer w0.254: U1.B.5@96.203,81.822 96.203,79.602 97.153,78.652 C10.B.1@97.153,77.697
NetC10.C_1: C10.C.1 U1.C.5 | length 4.5
  Top Layer w0.254: U1.C.5@131.134,81.773 131.134,79.553 132.084,78.603 C10.C.1@132.084,77.648
NetC10.D_1: C10.D.1 U1.D.5 | length 4.5
  Top Layer w0.254: U1.D.5@166.094,81.851 166.094,79.631 167.044,78.681 C10.D.1@167.044,77.726
NetC10.E_1: C10.E.1 U1.E.5 | length 4.5
  Top Layer w0.254: U1.E.5@200.984,81.9 200.984,79.68 201.934,78.73 C10.E.1@201.934,77.775
NetC12.A_1: C12.A.1 U2.A.12 | length 2.7
  Top Layer w0.152: C12.A.1@39.603,60.91 40.698,59.815 U2.A.12@41.826,59.815
NetC12.B_1: C12.B.1 U2.B.12 | length 2.7
  Top Layer w0.152: C12.B.1@62.548,60.872 63.643,59.777 U2.B.12@64.771,59.777
NetC12.C_1: C12.C.1 U2.C.12 | length 2.7
  Top Layer w0.152: C12.C.1@108.909,60.823 110.004,59.728 U2.C.12@111.132,59.728
NetC12.D_1: C12.D.1 U2.D.12 | length 2.7
  Top Layer w0.152: C12.D.1@146.372,62.22 147.467,61.125 U2.D.12@148.594,61.125
NetC12.E_1: C12.E.1 U2.E.12 | length 2.7
  Top Layer w0.152: C12.E.1@193.999,62.22 195.094,61.125 U2.E.12@196.222,61.125
NetC18.A_1: C18.A.1 U3.A.5 | length 4.5
  Top Layer w0.254: U3.A.5@43.794,81.86 43.794,79.64 44.744,78.69 C18.A.1@44.744,77.735
NetC18.B_1: C18.B.1 U3.B.5 | length 4.5
  Top Layer w0.254: U3.B.5@78.677,81.822 78.677,79.602 79.627,78.652 C18.B.1@79.627,77.697
NetC18.C_1: C18.C.1 U3.C.5 | length 4.5
  Top Layer w0.254: U3.C.5@113.608,81.773 113.608,79.553 114.558,78.603 C18.C.1@114.558,77.648
NetC18.D_1: C18.D.1 U3.D.5 | length 4.5
  Top Layer w0.254: U3.D.5@148.568,81.851 148.568,79.631 149.518,78.681 C18.D.1@149.518,77.726
NetC18.E_1: C18.E.1 U3.E.5 | length 4.5
  Top Layer w0.254: U3.E.5@183.458,81.9 183.458,79.68 184.408,78.73 C18.E.1@184.408,77.775
NetD1_1: D1.1 R33.2 | length 2.6
  Top Layer w0.152: D1.1@116.682,40.692 117.952,41.962 R33.2@118.738,41.962
NetD2_1: D2.1 R34.2 | length 2.2
  Top Layer w0.152: D2.1@116.682,43.232 116.936,43.486 R34.2@118.738,43.486
NetJ1_2: J1.2 U8.15 | length 10.6
  Top Layer w0.152: U8.15@85.076,37.379 86.182,37.379 87.158,36.403 91.157,36.403 91.786,37.032 91.786,38.81 92.303,39.327 J1.2@93.056,39.327
NetJ2_2: J2.2 U8.16 | length 8.1
  Top Layer w0.152: U8.16@85.076,38.029 85.963,38.029 87.285,36.707 88.921,36.707 89.246,37.032 89.246,38.81 89.763,39.327 J2.2@90.516,39.327
NetJ3_2: J3.2 U8.17 | length 3.2
  Top Layer w0.152: U8.17@85.076,38.679 86.321,38.679 86.969,39.327 J3.2@87.976,39.327
NetJ4_2: J4.2 U9.15 | length 10.6
  Top Layer w0.152: U9.15@133.306,38.625 134.412,38.625 135.388,37.649 139.387,37.649 140.016,38.278 140.016,40.056 140.533,40.573 J4.2@141.286,40.573
NetJ5_2: J5.2 U9.16 | length 8.1
  Top Layer w0.152: U9.16@133.306,39.275 134.193,39.275 135.515,37.953 137.151,37.953 137.476,38.278 137.476,40.056 137.993,40.573 J5.2@138.746,40.573
NetJ6_2: J6.2 U9.17 | length 3.2
  Top Layer w0.152: U9.17@133.306,39.925 134.551,39.925 135.199,40.573 J6.2@136.206,40.573
NetJ7_2: J7.2 U12.15 | length 10.6
  Top Layer w0.152: U12.15@171.212,39.169 172.318,39.169 173.295,38.193 177.293,38.193 177.922,38.822 177.922,40.6 178.439,41.117 J7.2@179.192,41.117
NetJ8_2: J8.2 U12.16 | length 8.1
  Top Layer w0.152: U12.16@171.212,39.819 172.099,39.819 173.421,38.497 175.058,38.497 175.382,38.822 175.382,40.6 175.899,41.117 J8.2@176.652,41.117
NetJ9_2: J9.2 U12.17 | length 3.2
  Top Layer w0.152: U12.17@171.212,40.469 172.457,40.469 173.105,41.117 J9.2@174.112,41.117
NetQ1.A_D1: Q1.A.D1 Q1.A.D2 | length 5.8
  Top Layer w0.254: Q1.A.D2@55.818,54.54 Q1.A.D1@55.818,60.29
NetQ1.A_G1: Q1.A.G1 U2.A.2 | length 9.3
  Top Layer w0.203: U2.A.2@48.176,59.815 48.176,58.367 48.493,58.05 53.573,58.05 53.868,58.345 Q1.A.G1@53.868,60.29
NetQ1.A_G2: Q1.A.G2 U2.A.24 | length 8.7
  Top Layer w0.203: U2.A.24@48.811,55.015 48.811,56.462 49.128,56.78 53.573,56.78 53.868,56.485 Q1.A.G2@53.868,54.54
NetQ1.A_S1: Q1.A.S1 R1.A.2 U2.A.3 | length 13.9
  Top Layer w0.152: U2.A.3@47.541,59.815 47.541,61.113 48.288,61.86 54.843,61.86
  Top Layer w0.305: Q1.A.S1@54.518,60.29 54.518,61.535 54.843,61.86 55.168,61.535 Q1.A.S1@55.168,60.29
  Top Layer w1.016: 54.843,61.86 R1.A.2@54.843,63.45
NetQ1.B_D1: Q1.B.D1 Q1.B.D2 | length 5.8
  Top Layer w0.254: Q1.B.D2@78.763,54.502 Q1.B.D1@78.763,60.252
NetQ1.B_G1: Q1.B.G1 U2.B.2 | length 9.3
  Top Layer w0.203: U2.B.2@71.121,59.777 71.121,58.33 71.438,58.012 76.518,58.012 76.813,58.307 Q1.B.G1@76.813,60.252
NetQ1.B_G2: Q1.B.G2 U2.B.24 | length 8.7
  Top Layer w0.203: U2.B.24@71.756,54.977 71.756,56.425 72.073,56.742 76.518,56.742 76.813,56.447 Q1.B.G2@76.813,54.502
NetQ1.B_S1: Q1.B.S1 R1.B.2 U2.B.3 | length 13.8
  Top Layer w0.152: U2.B.3@70.486,59.777 70.486,60.87 71.438,61.822 77.788,61.822
  Top Layer w0.254: Q1.B.S1@77.463,60.252 77.463,61.497 77.788,61.822 78.113,61.497 Q1.B.S1@78.113,60.252
  Top Layer w1.016: 77.788,61.822 R1.B.2@77.788,63.412
NetQ1.C_D1: Q1.C.D1 Q1.C.D2 | length 5.8
  Top Layer w0.254: Q1.C.D2@125.124,54.453 Q1.C.D1@125.124,60.203
NetQ1.C_G1: Q1.C.G1 U2.C.2 | length 9.3
  Top Layer w0.203: U2.C.2@117.482,59.728 117.482,58.281 117.799,57.963 122.879,57.963 123.174,58.258 ; 123.174,58.258 Q1.C.G1@123.174,60.203
NetQ1.C_G2: Q1.C.G2 U2.C.24 | length 8.7
  Top Layer w0.203: U2.C.24@118.117,54.928 118.117,56.376 118.434,56.693 122.879,56.693 123.174,56.398 Q1.C.G2@123.174,54.453
NetQ1.C_S1: Q1.C.S1 R1.C.2 U2.C.3 | length 13.8
  Top Layer w0.152: U2.C.3@116.847,59.728 116.847,60.821 117.799,61.773 124.149,61.773
  Top Layer w0.254: Q1.C.S1@123.824,60.203 123.824,61.448 124.149,61.773 124.474,61.448 Q1.C.S1@124.474,60.203
  Top Layer w1.016: 124.149,61.773 R1.C.2@124.149,63.363
NetQ1.D_D1: Q1.D.D1 Q1.D.D2 | length 5.8
  Top Layer w0.254: Q1.D.D2@162.587,55.85 Q1.D.D1@162.587,61.6
NetQ1.D_G1: Q1.D.G1 U2.D.2 | length 9.3
  Top Layer w0.203: U2.D.2@154.944,61.125 154.944,59.677 155.262,59.36 160.342,59.36 160.637,59.655 Q1.D.G1@160.637,61.6
NetQ1.D_G2: Q1.D.G2 U2.D.24 | length 8.7
  Top Layer w0.203: U2.D.24@155.579,56.325 155.58,57.773 155.897,58.09 160.342,58.09 160.637,57.795 Q1.D.G2@160.637,55.85
NetQ1.D_S1: Q1.D.S1 R1.D.2 U2.D.3 | length 13.8
  Top Layer w0.152: U2.D.3@154.309,61.125 154.309,62.218 155.262,63.17 161.612,63.17
  Top Layer w0.254: Q1.D.S1@161.287,61.6 161.287,62.845 161.612,63.17 161.937,62.845 Q1.D.S1@161.937,61.6
  Top Layer w1.016: 161.612,63.17 R1.D.2@161.612,64.76
NetQ1.E_D1: Q1.E.D1 Q1.E.D2 | length 5.8
  Top Layer w0.254: Q1.E.D2@210.214,55.85 Q1.E.D1@210.214,61.6
NetQ1.E_G1: Q1.E.G1 U2.E.2 | length 9.3
  Top Layer w0.203: U2.E.2@202.572,61.125 202.572,59.678 202.889,59.36 207.969,59.36 208.264,59.655 ; 208.264,59.655 Q1.E.G1@208.264,61.6
NetQ1.E_G2: Q1.E.G2 U2.E.24 | length 8.7
  Top Layer w0.203: U2.E.24@203.207,56.325 203.207,57.773 203.524,58.09 207.969,58.09 208.264,57.795 Q1.E.G2@208.264,55.85
NetQ1.E_S1: Q1.E.S1 R1.E.2 U2.E.3 | length 13.8
  Top Layer w0.152: U2.E.3@201.937,61.125 201.937,62.218 202.889,63.17 209.239,63.17
  Top Layer w0.254: Q1.E.S1@208.914,61.6 208.914,62.845 209.239,63.17 209.564,62.845 Q1.E.S1@209.564,61.6
  Top Layer w1.016: 209.239,63.17 R1.E.2@209.239,64.76
NetQ2.A_D1: Q2.A.D1 Q2.A.D2 | length 5.9
  Top Layer w0.254: Q2.A.D1@34.818,54.54 Q2.A.D2@34.818,60.417
NetQ2.A_G1: Q2.A.G1 U2.A.13 | length 9.2
  Top Layer w0.152: Q2.A.G1@36.768,54.54 36.768,56.485 37.698,57.415 40.746,57.415 41.826,56.335 U2.A.13@41.826,55.015
NetQ2.A_G2: Q2.A.G2 U2.A.11 | length 8.2
  Top Layer w0.152: Q2.A.G2@36.768,60.29 37.363,60.29 38.079,59.574 40.111,59.574 41.635,58.05 42.143,58.05 42.461,58.367 U2.A.11@42.461,59.815
NetQ2.A_S2: Q2.A.S2 R12.A.2 U2.A.10 | length 13.9
  Top Layer w0.152: 35.793,61.86 42.397,61.86 43.096,61.161 U2.A.10@43.096,59.815
  Top Layer w0.305: Q2.A.S2@35.468,60.29 35.468,61.535 35.793,61.86 36.118,61.535 Q2.A.S2@36.118,60.29
  Top Layer w1.016: 35.793,61.86 R12.A.2@35.793,63.45
NetQ2.B_D1: Q2.B.D1 Q2.B.D2 | length 5.9
  Top Layer w0.254: Q2.B.D1@57.763,54.502 Q2.B.D2@57.763,60.379
NetQ2.B_G1: Q2.B.G1 U2.B.13 | length 9.2
  Top Layer w0.152: Q2.B.G1@59.713,54.502 59.713,56.447 60.643,57.377 63.691,57.377 64.771,56.298 U2.B.13@64.771,54.977
NetQ2.B_G2: Q2.B.G2 U2.B.11 | length 8.2
  Top Layer w0.152: Q2.B.G2@59.713,60.252 60.308,60.252 61.024,59.536 63.056,59.536 64.58,58.012 65.088,58.012 65.406,58.33 U2.B.11@65.406,59.777
NetQ2.B_S2: Q2.B.S2 R12.B.2 U2.B.10 | length 13.9
  Top Layer w0.152: 58.738,61.822 65.342,61.822 66.041,61.124 U2.B.10@66.041,59.777
  Top Layer w0.305: Q2.B.S2@58.413,60.252 58.413,61.497 58.738,61.822 59.063,61.497 Q2.B.S2@59.063,60.252
  Top Layer w1.016: 58.738,61.822 R12.B.2@58.738,63.412
NetQ2.C_D1: Q2.C.D1 Q2.C.D2 | length 5.9
  Top Layer w0.254: Q2.C.D1@104.124,54.453 Q2.C.D2@104.124,60.33
NetQ2.C_G1: Q2.C.G1 U2.C.13 | length 9.2
  Top Layer w0.152: Q2.C.G1@106.074,54.453 106.074,56.398 107.004,57.328 110.052,57.328 111.132,56.249 U2.C.13@111.132,54.928
NetQ2.C_G2: Q2.C.G2 U2.C.11 | length 8.2
  Top Layer w0.152: Q2.C.G2@106.074,60.203 106.669,60.203 107.385,59.487 109.417,59.487 110.941,57.963 111.449,57.963 111.767,58.281 U2.C.11@111.767,59.728
NetQ2.C_S2: Q2.C.S2 R12.C.2 U2.C.10 | length 13.9
  Top Layer w0.152: 105.099,61.773 111.703,61.773 112.402,61.075 U2.C.10@112.402,59.728
  Top Layer w0.305: Q2.C.S2@104.774,60.203 104.774,61.448 105.099,61.773 105.424,61.448 Q2.C.S2@105.424,60.203
  Top Layer w1.016: 105.099,61.773 R12.C.2@105.099,63.363